# Altium PCB 电源调压板.PcbDoc
Units mm, origin at the board's own origin, x right, y up, seen from the top; angles counter-clockwise.
Board outline 152.4 x 101.6 mm, 2 copper layers (Top Layer, Bottom Layer); 89 components, 50 nets, 243 pads, 57 vias.
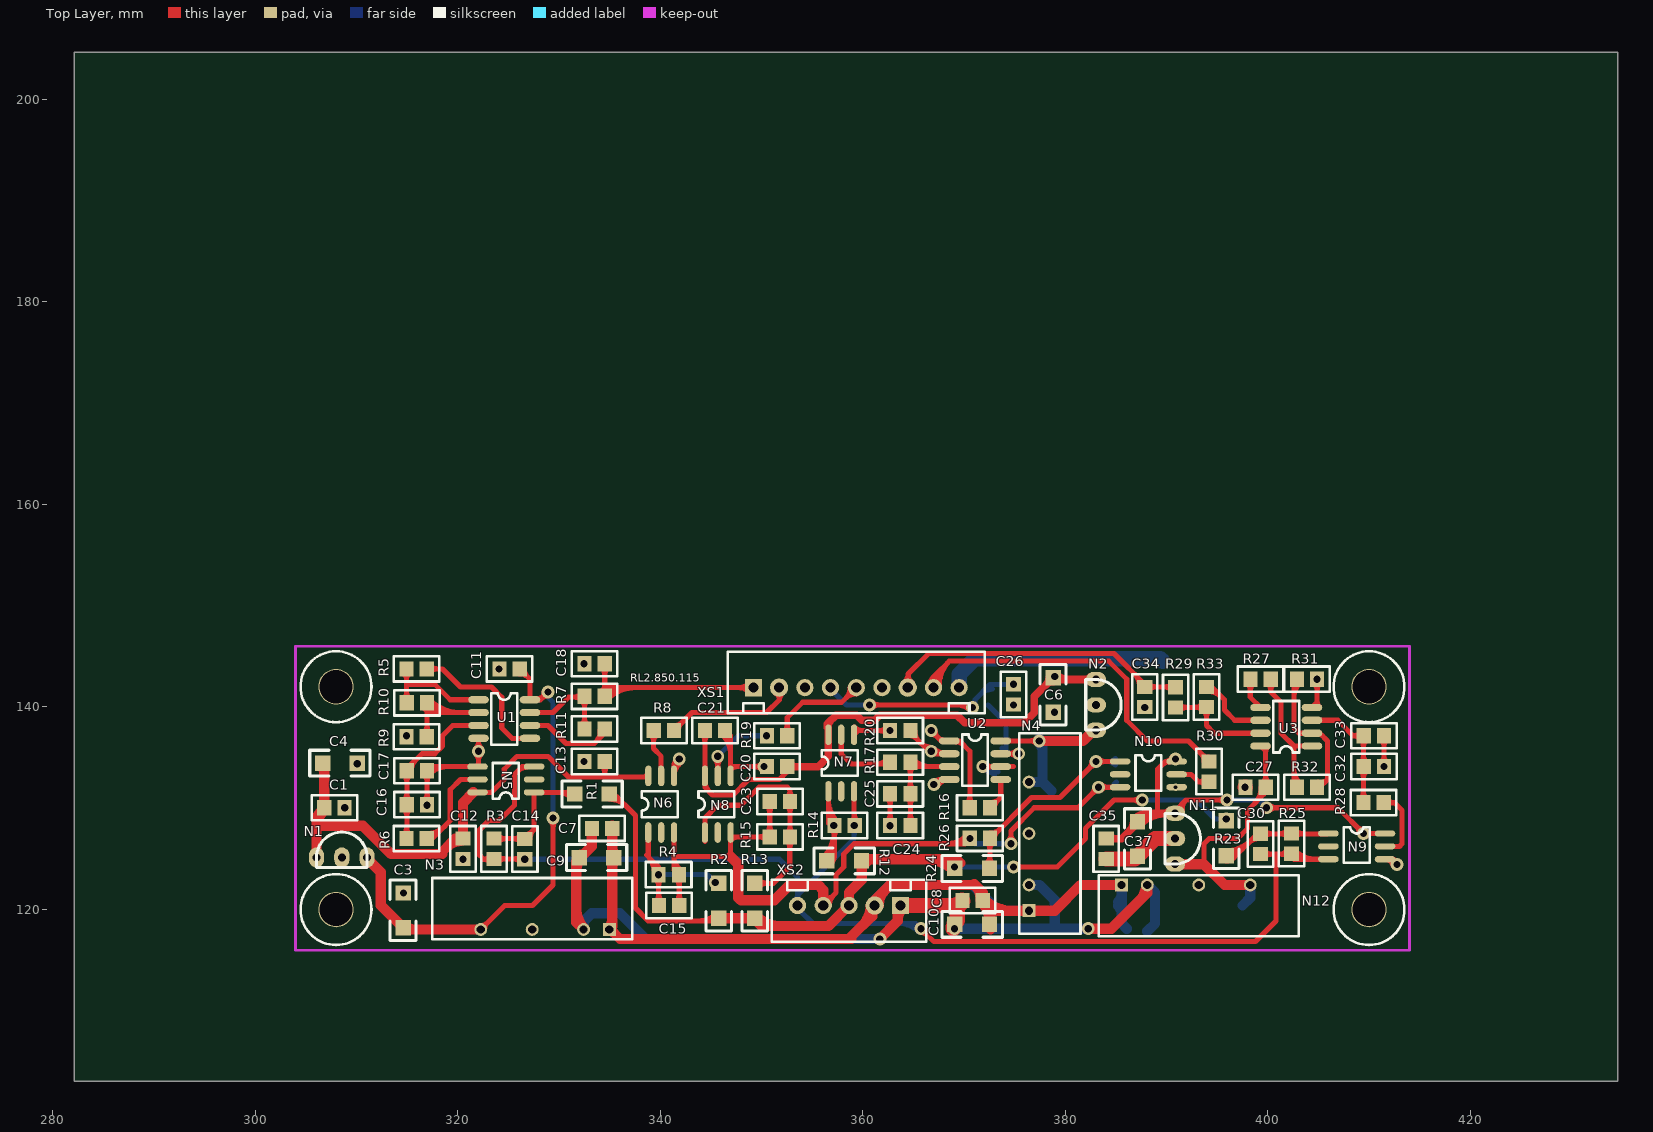
[diagram p0: Top Layer view]
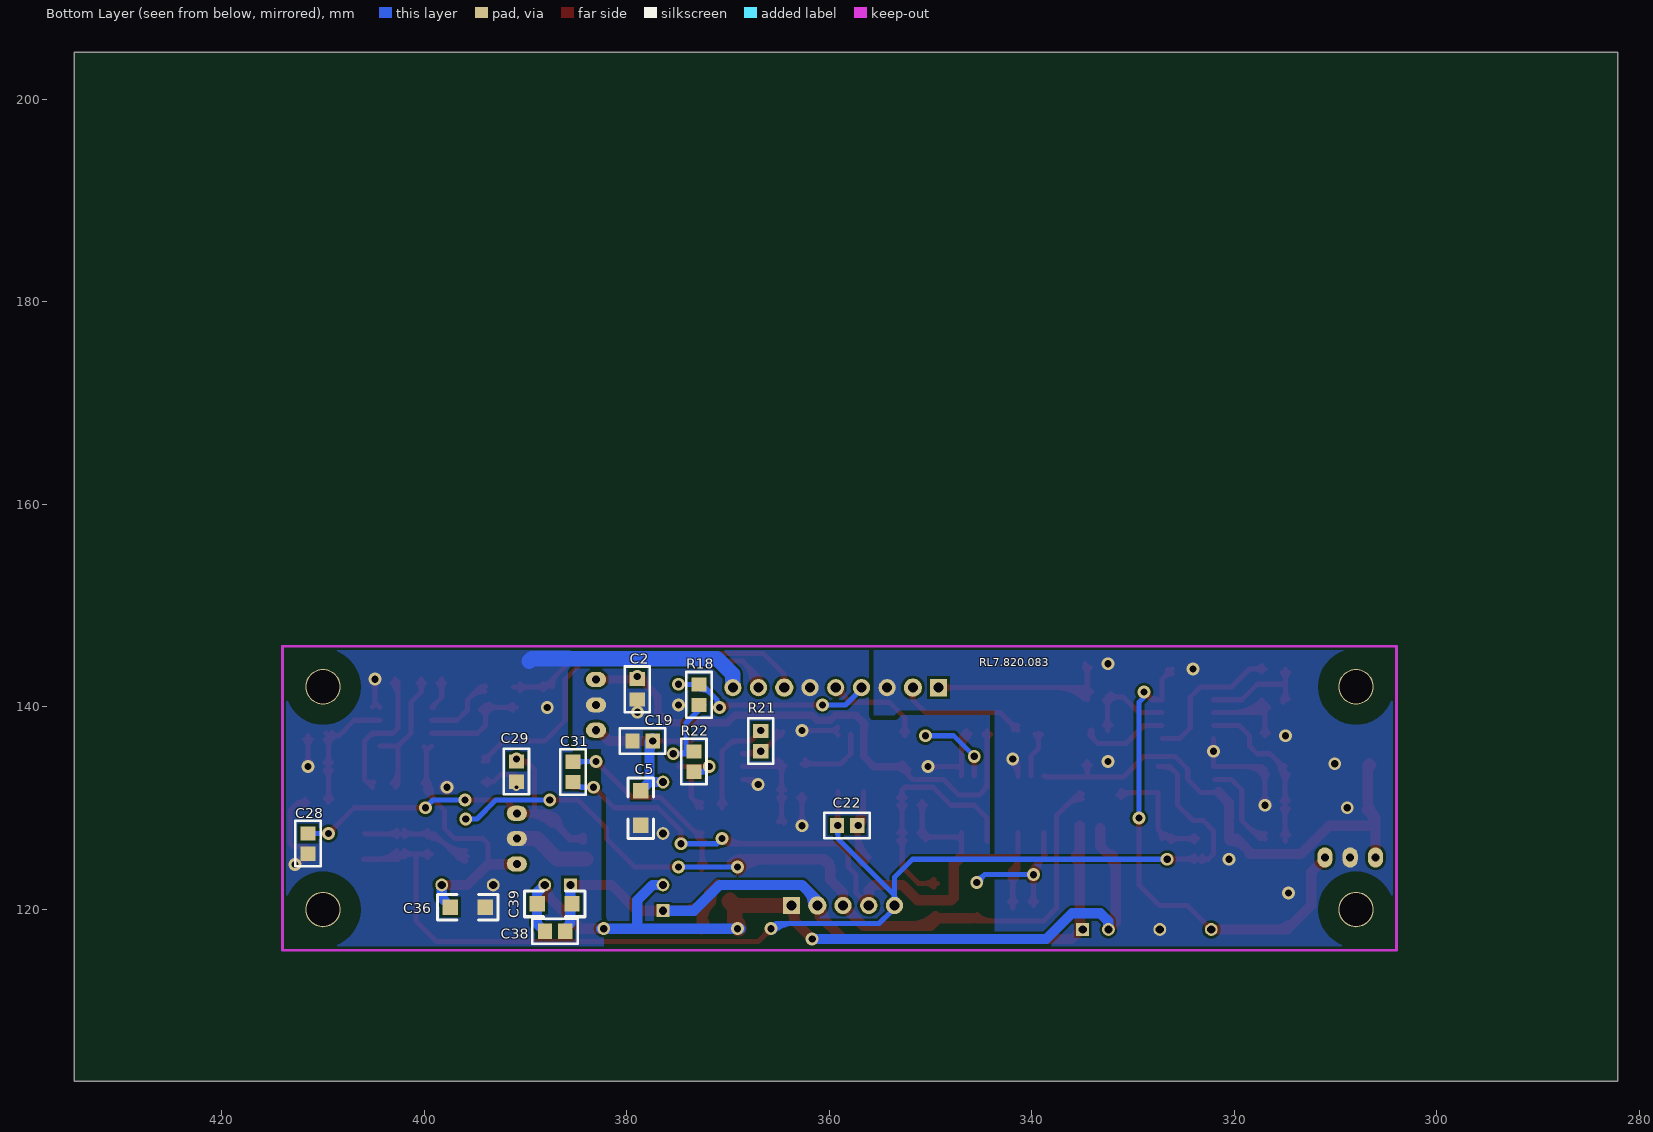
[diagram p1: Bottom Layer view, seen from below]

## Layer stack, top to bottom
Top Layer: signal copper 0.0356
Dielectric: dielectric 0.32, FR-4, Dk 4.8
Bottom Layer: signal copper 0.0356

## Board outline
282.156,103.046 434.556,103.046 434.556,204.646 282.156,204.646

## Design rules (kind name [scope] priority, off if disabled: settings)
Clearance Clearance_1 [(InPolygon) vs (InPolygon)] p1: gap=0.508
Clearance [All] p2: gap=0.254
ComponentClearance [All] p1: gap=0 collisioncheckmode=3 verticalgap=0 showdistances=FALSE
PolygonConnect [All] p1: connectstyle=Direct reliefconductorwidth=0.254 reliefentries=4 polygonreliefangle="90 Angle"
RoutingVias [All] p1: holewidth=0.711 width=1.27 viastyle="Through Hole" minholewidth=0.381 minwidth=0.762 maxholewidth=1.27 maxwidth=2.54
SilkscreenOverComponentPads [All] p1: minsilkscreentomaskgap=0.254
SolderMaskExpansion [All] p1: expansion=0.102
Width [All] p1: maxlimit=5.08 minlimit=0.254 preferedwidth=0.508
26 further rules are at their usual default settings.

## Components (designator, comment, footprint, x,y, rotation, side; value= is the part's Value field where it differs from the comment)
C1 "0.1u" 0805 306.832,130.048 r0 top
C2 "0.1u" 0805 378.968,142.748 r270 bottom
C3 "10u" 1206 315.976,116.84 r90 top
C4 "10u/25V" 1206 305.308,133.096 r0 top
C5 "10u" 1206 379.984,133.096 r270 bottom
C6 "10u/25V" 1206 377.444,144.272 r270 top
C7 "0.1u" 0805 335.28,128.016 r180 top
C8 "0.1u" 0805 371.856,120.904 r180 top
C9 "10u" 1206 336.804,126.492 r180 top
C10 "10u" 1206 373.888,119.888 r180 top
C11 "0.1u" 0805 326.136,143.764 r180 top
C12 "0.1u" 0805 320.548,127 r270 top
C13 "0.1u" 0805 334.532,134.62 r180 top
C14 "0.1u" 0805 326.644,124.968 r90 top
C15 "0.1u" 0805 341.884,120.396 r180 top
C16 "1u" 0805 316.992,130.353 r180 top
C17 "0.1u" 0805 316.992,133.706 r180 top
C18 "0.1u" 0805 334.532,144.272 r180 top
C19 "0.1u" 0805 377.444,136.652 r0 bottom
C20 "0.1u" 0805 352.552,134.112 r180 top
C21 "0.1u" 0805 344.424,137.668 r0 top
C22 "0.1u" 0805 359.248,128.286 r180 bottom
C23 "0.1u" 0805 350.828,130.673 r0 top
C24 "1u" 0805 362.712,128.304 r0 top
C25 "0.1u" 0805 362.712,131.425 r0 top
C26 "0.1u" 0805 374.904,142.24 r270 top
C27 "0.1u" 0805 399.796,132.08 r180 top
C28 "0.1u" 0805 411.48,127.508 r270 bottom
C29 "0.1u" 0805 390.906,134.62 r270 bottom
C30 "0.1u" 0805 399.288,125.476 r90 top
C31 "0.1u" 0805 385.318,132.588 r90 bottom
C32 "1u" 0805 411.48,134.112 r180 top
C33 "0.1u" 0805 411.48,137.16 r180 top
C34 "0.1u" 0805 387.858,141.986 r270 top
C35 "0.1u" 0805 384.048,127 r270 top
C36 "10u" 1206 398.78,118.872 r180 bottom
C37 "10u/25V" 1206 385.78,130.048 r270 top
C38 "0.1u" 0805 386.08,117.856 r0 bottom
C39 "10u" 1206 384.048,121.92 r0 bottom
N1 "78L05" TO-92_2 308.572,125.144 r0 top
N2 "78L05" TO-92_2 383.032,140.208 r270 top
N3 "B1212LM-1W" B0505LS 322.288,118.032 r180 top
N4 "B1212LM-1W" B0505LS 376.428,132.588 r90 top
N5 "FODM8071" SO-6 327.66,131.572 r180 top
N6 "FODM8071" SO-6 338.836,127.508 r90 top
N7 "FODM8071" SO-6 356.616,131.572 r90 top
N8 "FODM8071" SO-6 344.424,127.508 r90 top
N9 "FODM8071" SO-6 405.892,127.508 r0 top
N10 "FODM8071" SO-6 385.318,134.62 r0 top
N11 "78L05" TO-92_2 390.86,127 r270 top
N12 "B1212LM-1W" B0505LS 398.272,122.428 r0 top
R1 "330" 1206 330.2,130.048 r0 top
R2 "330" 1206 344.424,123.952 r270 top
R3 "4.7K" 0805 323.596,127 r270 top
R4 "4.7K" 0805 339.852,123.444 r0 top
R5 "10K" 0805 314.96,143.764 r0 top
R6 "1.5K" 0805 314.96,127 r0 top
R7 "1K" 0805 332.532,141.055 r0 top
R8 "220" 0805 341.376,137.668 r180 top
R9 "10K" 0805 314.96,137.058 r0 top
R10 "2.2K" 0805 316.992,140.411 r180 top
R11 "10K" 0805 334.532,137.837 r180 top
R12 "330" 1206 355.092,123.444 r0 top
R13 "330" 1206 347.98,123.952 r270 top
R14 "4.7K" 0805 357.216,128.286 r0 top
R15 "4.7K" 0805 352.828,127.176 r180 top
R16 "10K" 0805 370.568,130.048 r0 top
R17 "1.5K" 0805 364.712,134.547 r180 top
R18 "1K" 0805 372.872,140.208 r90 bottom
R19 "220" 0805 352.552,137.16 r180 top
R20 "10K" 0805 362.712,137.668 r0 top
R21 "2.2K" 0805 366.776,135.636 r90 bottom
R22 "10K" 0805 373.38,133.604 r90 bottom
R23 "330" 1206 397.256,123.952 r90 top
R24 "330" 1206 373.888,125.416 r180 top
R25 "4.7K" 0805 402.336,127.508 r270 top
R26 "4.7K" 0805 372.568,127.03 r180 top
R27 "10K" 0805 400.304,142.748 r180 top
R28 "1.5K" 0805 409.448,130.556 r0 top
R29 "1K" 0805 390.906,139.954 r90 top
R30 "220" 0805 394.208,134.62 r270 top
R31 "10K" 0805 404.876,142.748 r180 top
R32 "2.2K" 0805 404.876,132.08 r180 top
R33 "10K" 0805 393.954,141.986 r270 top
U1 "TLC2272" SO-8 322.072,140.716 r0 top
U2 "TLC2272" SO-8 368.554,136.652 r0 top
U3 "TLC2272" SO-8 404.368,136.144 r180 top
XS1 "OUTPUT" sip-9 349.212,141.908 r0 top
XS2 "INPUT" sip-5 363.728,120.396 r180 top

## Footprints (in the part's own frame and the unit in brackets; to place one, negate y for a bottom-side part, rotate by r counter-clockwise, add the part's x,y. Pads: shape width x height; smd on the part's side, far side on the other; paste and mask are expansions set on the pad)
0805 [mm]
  rect 1.4x1.5 smd: 1(0,0) 2(2,0)
  silkscreen extent -1.25,-1.25 3.25,1.25
1206 [mil]
  rect 60x60 smd: 1(53.76,53.48) 2(188.76,53.48)
  silkscreen extent 4,3 239,103
B0505LS [mil]
  rect 50x50 hole 32: 1(-500,0)
  round 50 hole 32: 2(-400,0) 3(-200,0) 4(0,0)
  silkscreen extent -589,-200 189,38
sip-5 [mm]
  rect 1.7x1.7 hole 1: 1(0,0)
  round 1.8 hole 1: 2(2.54,0)
  round 1.7 hole 1: 3(5.08,0) 4(7.62,0) 5(10.16,0)
  silkscreen extent -2.54,-2.54 12.7,3.56
sip-9 [mm]
  rect 1.7x1.7 hole 1: 1(0,0)
  round 1.8 hole 1: 2(2.54,0) 7(15.24,0)
  round 1.7 hole 1: 3(5.08,0) 4(7.62,0) 5(10.16,0) 6(12.7,0) 8(17.78,0) 9(20.32,0)
  silkscreen extent -2.54,-2.54 22.86,3.56
SO-6 [mil]
  oval 80x24 smd: 1(3.94,0) 2(3.94,-50) 3(3.94,-100) 4(223.94,-100) 5(223.94,-50) 6(223.94,0)
  silkscreen extent 64,-114 164,25
SO-8 [mil]
  oval 80x28 smd: 1(0,0) 2(0,-50) 3(0,-100) 4(0,-150) 5(200,-150) 6(200,-100) 7(200,-50) 8(200,0)
  silkscreen extent 50,-175 150,25
TO-92_2 [mm]
  oval 1.5x2 hole 0.8: 1(0,0) 2(-2.5,0) 3(2.5,0)
  silkscreen extent -2.5,-1 2.5,2.5

## Part data
C1 C2 C4 C6 C12 C13 C14 C15 C16 C17 C20 C21 C22 C23 C24 C25 C28 C29 C30 C31 C32 C33 C35 C37: library part CAP
C3 C5 C9 C10 C36 C39: library part ELECTRO1, "Electrolytic Capacitor"
C7 C8 C11 C18 C19 C26 C27 C34 C38: library part CAP, "Capacitor"
N1 N2 N11: library part VOL
N3 N4 N12: library part B0505LM
R1 R2 R3 R4 R6 R8 R9 R12 R13 R14 R15 R17 R19 R20 R23 R24 R25 R26 R28 R30 R31: library part Res2, "Resistor"
R5 R7 R10 R11 R16 R18 R21 R22 R27 R29 R32 R33: library part RES2
U1 U2 U3: library part 1458
XS1: library part "Header 9", "Header, 9-Pin"
XS2: library part "Header 5", "Header, 5-Pin"

## Free pads (board coordinates)
  round 3.5 hole 3.3: 0(308,120) 0(308,142) 0(410,120) 0(410,142)

## Via types
v1: diameter 1.27, hole 0.711, Top Layer to Bottom Layer, 56 vias
v2: diameter 0.762, hole 0.381, Top Layer to Bottom Layer, 1 vias

## Nets (pads, with @x,y where several pads share a name; then routed paths per layer and width w, separated by ;. In a path a pad name is that pad's centre, name@x,y a point inside that pad or via, vN(x,y) a via of type N, cw(c..) or ccw(c..) an arc to the next point about the centre after c; other vN are vias at no path point)
+5VISO1: C1.1 C4.1 C12.1 C13.1 N1.2 N5.6 N6.6 | length 62.6
  Top Layer w0.508: 306.324,128.524 306.578,128.27 ; C1.1@306.832,129.794 C1.1 ; N5.6@321.564,131.572 321.818,131.572 N5.6 323.342,131.572 324.612,132.842 324.612,133.858 325.882,135.128 328.93,135.128 330.962,133.096 334.518,133.096 ; C13.1@334.216,134.255 cw(c333.455,133.493) 334.532,133.493 cw(c335.609,133.493) C13.1@334.847,134.255 ; C13.1@334.518,134.606 C13.1 334.532,133.11 334.518,133.096 ; 338.472,133.096 ccw(c338.472,133.56) N6.6@338.8,133.232 ; N6.6@338.582,133.096 334.518,133.096 ; N6.6@338.582,133.196 N6.6
  Top Layer w1.016: N1.2 306.072,128.27 ; 306.072,128.11 cw(c308.227,128.11) C1.1@306.946,129.844 ; 306.072,128.77 cw(c307.147,128.77) C1.1@306.88,129.812 ; C1.1@306.36,129.322 ccw(c305.684,129.998) C1.1@306.64,129.998 ; C4.1@306.494,134.275 cw(c305.677,133.458) 306.832,133.458 ; C4.1 306.832,134.296 C1.1@306.832,130.556 ; C1.1@306.832,129.794 306.072,129.034 306.072,128.27 ; 318.955,126.169 cw(c320.498,124.626) C12.1@320.498,126.808 ; 319.43,126.644 cw(c320.056,126.019) C12.1@320.419,126.825 ; N5.6@321.564,131.572 320.548,130.556 C12.1 319.786,127 318.516,125.73 318.516,125.476 313.436,125.476 310.642,128.27 306.578,128.27 306.072,128.27
+5VISO2: C2.1 C6.1 C20.1 C21.1 N2.2 N7.6 N8.6 | length 65
  Top Layer w0.508: C21.1@344.109,137.303 cw(c343.347,136.541) 344.424,136.541 cw(c345.501,136.541) C21.1@344.739,137.303 ; C21.1 N8.6 344.424,132.08 345.186,131.318 347.218,131.318 348.742,132.842 351.79,132.842 C20.1@352.552,133.604 ; N8.6@344.475,132.485 ccw(c345.575,132.485) 344.797,131.707 ; 352.019,133.071 ccw(c351.529,133.561) C20.1@352.151,133.866
  Top Layer w0.762: C20.1 355.6,134.112 356.616,135.128 N7.6 356.616,138.43 ; C20.1@352.778,133.886 cw(c353.322,133.342) 353.322,134.112 cw(c353.322,134.882) C20.1@352.778,134.338 ; N7.6@356.54,137.971 cw(c357.463,137.971) 356.81,138.624 ; N7.6@356.55,137.933 cw(c356.908,138.138) 356.616,138.43 ; C6.1@378.415,142.519 cw(c378.968,141.965) 378.968,142.748 379.008,142.708 N2.2 ; C6.1@378.421,142.907 cw(c377.502,142.907) 378.152,142.256 cw(c378.802,141.606) C6.1@378.802,142.526 ; C6.1 376.936,141.04 376.936,139.446 375.92,138.43 370.078,138.43 369.316,139.192 361.696,139.192 361.188,138.684 359.918,138.684 359.41,139.192 357.378,139.192 356.616,138.43 ; C6.1@379.072,143.176 ccw(c380.202,144.306) 380.202,142.708 ; C6.1@379.148,143.182 ccw(c380.291,144.325) 380.291,142.708 ; N2.2@382.521,142.447 ccw(c381.891,141.817) 381.891,142.708 ccw(c381.891,143.599) N2.2@382.521,142.969
  Bottom Layer w0.762: C2.1 v1(378.968,143.002)
+5VISO3: C28.1 C29.1 C35.1 C37.1 N9.6 N10.6 N11.2 | length 57.2
  Top Layer w0.508: 389.128,129.54 389.128,133.858 389.89,134.62 ; 389.517,134.247 cw(c390.295,133.469) N10.6@390.295,134.569 ; 389.688,134.418 cw(c390.115,133.991) N10.6@390.281,134.571 ; v1@390.564,135.041 cw(c389.89,135.369) 389.89,134.62 ; N11.2@390.906,129.794 391.922,130.81 ; v1(390.906,134.874) 390.906,134.62 N10.6 389.89,134.62 ; N11.2@391.591,129.62 cw(c392.81,129.922) 391.922,130.81 ; v1@395.717,130.541 ccw(c395.066,129.89) 395.066,130.81 ccw(c395.066,131.73) v1@395.717,131.079 ; v1(395.986,130.81) 391.922,130.81 ; v1(399.888,130.048) 406.908,130.048 v1(409.448,127.508) N9.6 ; v1@400.158,129.779 cw(c400.808,129.128) 400.808,130.048 cw(c400.808,130.968) v1@400.158,130.317 ; v1@409.067,127.508 ccw(c408.147,127.508) 408.798,128.158 ccw(c409.448,128.809) v1@409.448,127.889 ; v1@409.717,127.239 cw(c410.368,126.588) 410.368,127.508 cw(c410.368,128.428) v1@409.717,127.777
  Top Layer w0.762: C35.1@384.302,127 385.572,127 388.072,129.5 N11.2 ; C35.1@384.324,126.774 cw(c384.868,126.23) 384.868,127 cw(c384.868,127.77) C35.1@384.324,127.226 ; 386.406,127.834 ccw(c385.557,128.683) C37.1@386.757,128.683 ; C37.1@386.869,128.952 cw(c388.192,127.629) 388.192,129.5 ; C37.1@387.138,129.064 ccw(c387.138,130.264) 387.987,129.415 ; C37.1@387.408,128.413 cw(c390.032,125.789) N11.2@390.032,129.5 ; N11.2@390.349,129.239 ccw(c389.719,128.609) 389.719,129.5 ccw(c389.719,130.391) N11.2@390.349,129.761
  Bottom Layer w0.508: v1(395.986,130.81) 399.126,130.81 v1(399.888,130.048) ; v1(409.448,127.508) C28.1
+12V: C7.1 C8.1 C9.1 C10.1 C38.1 C39.1 N3.1 N4.1 N12.1 XS2.2 | length 110.4
  Top Layer w1.016: N3.1@334.898,118.122 ccw(c333.976,119.044) 335.28,119.044 ; N3.1 335.28,118.324 C7.1 C7.1@335.28,128.27 ; N3.1@335.026,118.11 335.046,118.09 336.042,117.094 358.902,117.094 ; 335.28,124.138 cw(c336.435,124.138) C9.1@335.618,124.954 ; 335.28,126.13 ccw(c336.435,126.13) C9.1@335.618,125.313 ; 358.902,117.348 360.934,119.38 360.934,120.65 362.712,122.428 371.094,122.428 371.856,121.666 C8.1@371.856,121.158 ; 359.98,118.426 ccw(c358.01,120.396) XS2.2@360.796,120.396 ; 360.934,119.349 cw(c361.714,119.349) XS2.2@361.364,120.046 ; XS2.2@361.58,120.396 cw(c363.753,120.396) 362.216,121.932 ; 371.025,122.497 cw(c369.482,120.954) C8.1@371.664,120.954 ; C8.1@371.72,120.718 cw(c369.553,118.551) C10.1@372.618,118.551 ; C8.1@371.839,120.663 cw(c371.763,119.811) 372.618,119.811 ; C8.1 372.618,120.142 C10.1@372.618,118.022 ; C8.1@371.992,120.99 ccw(c374.652,123.65) 374.652,119.888 ; C10.1@372.343,118.709 ccw(c371.679,119.373) 372.618,119.373 ; 372.872,119.888 N4.1 378.968,119.888 381.508,122.428 N12.1
  Bottom Layer w1.016: XS2.2 361.188,120.904 362.712,122.428 370.84,122.428 373.38,119.888 N4.1 ; XS2.2@361.58,120.396 cw(c363.753,120.396) 362.216,121.932 ; C39.1@385.234,120.382 cw(c384.417,119.566) 385.572,119.566 ; C39.1@385.234,120.741 ccw(c384.417,121.558) 385.572,121.558 ; N12.1 385.572,118.618 C38.1@386.08,118.11
+12VISO1: C3.1 C11.1 N1.3 N3.4 U1.8 | length 57.4
  Top Layer w0.508: N3.4 324.652,120.396 327.406,120.396 329.438,122.428 v1(329.438,129.032) ; N3.4@322.288,118.413 ccw(c322.288,119.333) 322.938,118.682 ccw(c323.589,118.032) N3.4@322.669,118.032 ; C11.1@326.136,143.268 cw(c326.136,142.071) 326.983,142.917 ; C11.1 327.152,142.748 U1.8@327.152,140.97 ; C11.1@326.582,143.714 ccw(c327.538,143.714) 326.862,143.038 ; U1.8 328.168,140.716 v1(328.93,141.478) ; U1.8@327.812,140.818 ccw(c327.812,141.921) v1@328.593,141.141 ; v1@328.549,141.478 cw(c327.629,141.478) 328.28,140.828 cw(c328.93,140.177) v1@328.93,141.097 ; v1@329.169,128.763 cw(c328.518,128.112) 329.438,128.112 cw(c330.358,128.112) v1@329.707,128.763
  Top Layer w1.016: N1.3@311.072,124.652 cw(c311.072,123.701) 311.745,124.373 ; N1.3@311.15,124.968 312.42,123.698 312.42,120.403 C3.1 ; C3.1@314.706,118.11 314.784,118.032 N3.4 ; C3.1@314.797,118.385 ccw(c315.649,119.237) 315.649,118.032
  Bottom Layer w0.508: v1@328.93,140.97 329.438,140.462 v1(329.438,129.032)
+12VISO2: C5.1 C19.1 N2.3 N4.4 U2.8 | length 19.1
  Top Layer w0.508: U2.8 v1(377.444,136.652) ; v1@377.175,136.383 ccw(c376.524,135.732) 376.524,136.652 ccw(c376.524,137.572) v1@377.175,136.921
  Top Layer w1.016: v1(377.444,136.652) 381.762,136.652 N2.3@382.778,137.668
  Bottom Layer w1.016: N4.4 377.768,132.588 ; C19.1@377.354,136.562 cw(c376.355,135.563) 377.768,135.563 ; C19.1@377.444,136.906 377.768,136.582 377.768,132.588 ; C5.1 377.768,132.588
+12VISO3: C27.1 C36.1 N11.3 N12.4 U3.8 | length 31.1
  Top Layer w0.508: 393.7,124.968 393.7,126.492 394.208,127 397.002,127 398.018,128.016 398.018,129.794 399.796,131.572 C27.1 399.796,135.636 U3.8 ; 398.711,130.487 ccw(c397.168,132.03) C27.1@399.35,132.03 ; C27.1@399.481,132.445 ccw(c398.719,133.207) 399.796,133.207 ccw(c400.873,133.207) C27.1@400.111,132.445 ; C27.1@399.578,131.354 ccw(c398.902,132.03) C27.1@399.858,132.03 ; 399.796,135.531 cw(c400.562,135.531) U3.8@400.02,136.072 ; 399.796,135.614 cw(c400.375,135.614) U3.8@400.012,136.065
  Top Layer w1.016: N11.3@391.16,124.46 393.7,124.46 395.732,122.428 N12.4
  Bottom Layer w1.016: C36.1@397.51,120.396 398.272,121.158 N12.4
GND: C7.2 C8.2 C9.2 C10.2 C38.2 C39.2 N3.2 N4.2 N12.2 XS2.1 | length 99
  Top Layer w1.016: 331.724,120.086 ccw(c334.502,120.086) N3.2@332.538,118.122 ; 331.724,123.831 cw(c333.312,123.831) C9.2@332.189,124.954 ; C9.2@332.01,125.388 ccw(c332.01,126.324) C9.2@332.672,125.662 ; N3.2 331.724,118.756 331.724,124.714 333.248,126.238 C7.2@333.248,128.016 ; v1(361.696,117.094) 363.474,118.872 XS2.1@363.474,120.65 ; 363.474,118.957 cw(c365.167,118.957) XS2.1@363.97,120.154 ; 369.062,120.11 369.332,120.38 C8.2 ; v1(382.27,118.11) 384.556,118.11 388.112,121.666 N12.2 ; 387.356,120.91 ccw(c385.839,122.428) N12.2@387.985,122.428
  Top Layer w1.524: XS2.1 369.062,120.396 ccw(c369.062,121.452) C8.2@369.906,120.817 ; 368.9,120.396 ccw(c368.9,121.81) C8.2@369.9,120.81 ; C10.2@368.935,118.11 cw(c369.855,118.11) C10.2@369.204,118.76 ; C10.2@369.062,118.618 369.332,118.888 C8.2@369.332,120.38 ; 369.332,119.739 cw(c370.971,119.739) C8.2@369.812,120.898
  Bottom Layer w1.016: N3.2 332.448,118.834 333.248,119.634 336.042,119.634 338.582,117.094 v1(361.696,117.094) ; v1@368.808,118.11 v1(369.062,118.11) v1(382.27,118.11) v1@382.524,118.11 ; N4.2 377.444,122.428 378.968,120.904 378.968,118.364 ; C38.2@388.112,117.856 388.874,118.618 388.874,121.666 N12.2
GNDISO1: C1.2 C3.2 C4.2 C11.2 C12.2 C13.2 C16.1 C17.1 C18.2 N1.1 N3.3 N5.4 N6.4 R9.1 U1.4 XS1.3 | length 28.4
  Top Layer w0.508: C16.1@316.677,130.718 ccw(c315.915,131.48) 316.992,131.48 ccw(c318.069,131.48) C16.1@317.307,130.718 ; C17.1@316.677,133.34 cw(c315.915,132.579) 316.992,132.579 cw(c318.069,132.579) C17.1@317.307,133.34 ; C16.1@316.723,130.571 ccw(c316.072,131.222) 316.992,131.222 ccw(c317.912,131.222) C16.1@317.261,130.571 ; C17.1@316.948,133.799 cw(c317.703,133.045) 317.703,134.112 ; C17.1 C16.1 ; C17.1@317.246,133.604 317.754,134.112 ; C17.1@317.282,134.094 ccw(c317.509,134.357) 317.754,134.112 ; C17.1@317.307,133.44 cw(c318.929,131.818) 318.929,134.112 ; v1(320.548,124.968) C12.2 ; v1@321.803,135.367 cw(c321.152,134.716) 322.072,134.716 cw(c322.992,134.716) v1@322.341,135.367 ; v1@321.803,135.905 ccw(c321.152,136.556) 322.072,136.556 ccw(c322.992,136.556) v1@322.341,135.905 ; N5.4@321.936,134.148 ccw(c321.608,134.476) 322.072,134.476 ; N5.4 317.754,134.112 ; N5.4@322.072,134.112 v1(322.072,135.636) U1.4 ; v1(324.104,143.764) C11.2 ; v1(332.486,134.62) C13.2 ; v1(332.486,144.272) C18.2 ; N6.4@341.376,133.121 cw(c343.168,133.121) v1@342.109,134.567 ; N6.4 341.376,134.366 v1(341.884,134.874) ; N6.4@341.376,134.123 cw(c342.434,134.123) v1@341.809,134.976 ; N6.4@341.427,133.907 cw(c342.657,133.907) v1@341.787,134.777 ; C16.1 v1(316.992,130.302) C16.1
  Top Layer w0.762: C1.2 v1(308.864,130.048) ; v1(310.102,134.398) C4.2 ; C3.2 v1(314.674,121.634) ; R9.1 v1(314.96,137.16)
GNDISO2: C2.2 C5.2 C6.2 C19.2 C20.2 C21.2 C24.1 C25.1 C26.2 N2.1 N4.3 N7.4 N8.4 R20.1 U2.4 XS1.6 | length 37.4
  Top Layer w0.508: C21.2@346.109,137.303 cw(c344.044,135.238) 346.964,135.238 ; C21.2@346.456,137.668 346.964,137.16 N8.4@346.964,134.112 ; C21.2@346.468,137.662 cw(c345.27,136.464) 346.964,136.464 ; N8.4 N8.4@346.964,134.112 ; N8.4@347,133.871 cw(c347.581,133.29) 347.581,134.112 ; C20.2@349.997,133.843 ccw(c349.346,133.192) 349.346,134.112 ccw(c349.346,135.032) C20.2@349.997,134.381 ; C20.2@350.237,133.797 ccw(c349.475,133.035) 349.475,134.112 ccw(c349.475,135.189) C20.2@350.237,134.427 ; v1(350.266,134.112) C20.2 N8.4@346.964,134.112 ; N7.4 359.564,137.668 ; N7.4@359.192,138.007 ccw(c360.011,138.826) 360.011,137.668 ; N7.4@359.206,137.978 ccw(c359.564,138.029) 359.564,137.668 ; C24.1@362.397,128.669 ccw(c361.635,129.431) 362.712,129.431 ccw(c363.789,129.431) C24.1@363.027,128.669 ; C25.1@362.397,131.06 cw(c361.635,130.299) 362.712,130.299 cw(c363.789,130.299) C25.1@363.027,131.06 ; R20.1@362.397,137.353 ccw(c361.635,136.591) 361.635,137.668 ccw(c361.635,138.745) R20.1@362.397,137.983 ; C24.1@362.443,128.539 ccw(c361.792,129.19) 362.712,129.19 ccw(c363.632,129.19) C24.1@362.981,128.539 ; R20.1@362.443,137.399 ccw(c361.792,136.748) 361.792,137.668 ccw(c361.792,138.588) R20.1@362.443,137.937 ; C25.1 C24.1 ; v1(362.712,137.668) 359.564,137.668 ; v1@366.919,132.397 cw(c367.683,131.965) U2.4@367.683,132.842 ; v1(367.03,132.334) 367.538,132.842 U2.4 ccw(c368.554,131.472) v1@367.362,132.146 ; v1@367.113,132.417 cw(c367.894,131.637) U2.4@367.894,132.74 ; v1(374.904,140.208) C26.2 ; C6.2 v1(378.936,139.478) ; C24.1 v1(362.712,128.27) C24.1
GNDISO3: C27.2 C28.2 C29.2 C32.1 C33.1 C34.2 C35.2 C36.2 C37.2 N9.4 N10.4 N11.1 N12.3 R31.1 U3.4 XS1.9 | length 48.3
  Top Layer w0.508: v1(387.858,139.954) C34.2 ; U3.4 404.876,140.462 ; R31.1@404.561,142.383 cw(c403.799,141.621) 404.876,141.621 cw(c405.953,141.621) R31.1@405.191,142.383 ; R31.1@404.607,142.479 cw(c403.956,141.828) 404.876,141.828 cw(c405.796,141.828) R31.1@405.145,142.479 ; 404.876,140.567 ccw(c405.642,140.567) U3.4@405.1,140.026 ; v1(404.876,142.748) 404.876,140.462 ; U3.4@405.089,140.035 cw(c405.409,140.462) 404.876,140.462 ; C32.1@411.165,134.477 ccw(c410.403,135.239) 411.48,135.239 ccw(c412.557,135.239) C32.1@411.795,134.477 ; C33.1@411.165,136.795 cw(c410.403,136.033) 411.48,136.033 cw(c412.557,136.033) C33.1@411.795,136.795 ; C32.1@411.211,134.381 ccw(c410.56,135.032) 411.48,135.032 ccw(c412.4,135.032) C32.1@411.749,134.381 ; v1(411.48,134.112) C33.1 ; N9.4@412.249,124.968 cw(c412.249,124.321) v1@412.872,124.494 ; v1@412.383,124.358 ccw(c411.58,124.135) N9.4 412.242,124.968 v1(412.75,124.46)
  Top Layer w1.5: C35.2 386.874,125 388.874,127 N11.1 N11.1@390.906,127 ; v1(397.764,132.08) C27.2
  Bottom Layer w1.524: XS1.9 369.532,143.218 371.094,144.78 389.382,144.78 389.636,144.526
  other v2: 390.906,132.08
MCU_5V: R1.2 R2.2 R12.2 R13.2 R23.2 R24.2 XS2.3 | length 99.9
  Top Layer w0.508: R1.2@334.994,130.898 cw(c334.994,128.583) 336.632,130.22 ; R1.2 cw(c334.994,130.317) 335.765,131.087 ; R1.2@335.28,131.572 337.566,129.286 337.566,120.142 338.836,118.872 345.497,118.872 R2.2@345.751,119.126 ; 343.866,118.872 ccw(c343.866,121.074) R2.2@345.423,119.517 ; R2.2@345.694,119.126 R2.2@345.751,119.126 ; R2.2@345.782,119.126 R2.2@345.751,119.126 ; R2.2 R2.2@345.751,119.126 ; R24.2@369.004,124.148 R24.2 ; v1(374.904,124.206) 379.222,124.206 382.016,127 382.016,128.016 384.81,130.81 v1(387.604,130.81) ; v1@375.173,123.937 cw(c375.824,123.286) 375.824,124.206 cw(c375.824,125.126) v1@375.173,124.475 ; v1@387.335,130.541 ccw(c386.684,129.89) 386.684,130.81 ccw(c386.684,131.73) v1@387.335,131.079
  Top Layer w0.762: R2.2@345.782,119.126 R2.2@345.948,119.126
  Top Layer w1.016: R2.2@345.948,119.126 349.25,119.126 350.012,118.364 356.616,118.364 XS2.3 358.648,121.666 359.918,122.936 359.918,124.206 360.68,124.968 ; R13.2@349.518,119.337 ccw(c351.868,121.687) 351.868,118.364 ; R13.2@349.592,119.158 ccw(c350.495,119.158) R13.2@349.857,118.519 ; R12.2@360.066,124.623 cw(c360.899,123.789) 360.899,124.968 ; R12.2@360.096,124.659 cw(c360.68,124.262) 360.68,124.968 ; 366.282,124.968 cw(c366.282,121.246) R24.2@368.914,123.878 ; 366.916,124.968 cw(c366.916,122.06) R24.2@368.972,124.116 ; R24.2@368.577,124.691 cw(c367.944,124.058) R24.2@368.84,124.058 ; 368.735,124.968 cw(c368.735,123.699) R24.2@369.632,124.596 ; v1(369.062,124.206) 368.3,124.968 360.68,124.968 ; R23.2 v1(395.898,128.944)
  Bottom Layer w0.508: v1(369.062,124.206) v1(374.904,124.206) ; v1(387.604,130.81) 392.938,130.81 394.804,128.944 v1(395.898,128.944)
NetC14_2: C14.2 N5.1 R1.1 R3.1 | length 19
  Top Layer w0.508: R3.1 326.644,127 327.56,127.916 N5.1 331.216,131.572 R1.1@331.47,131.318 ; R3.1@323.961,126.685 cw(c324.723,125.923) 324.723,127 cw(c324.723,128.077) R3.1@323.961,127.315 ; 325.44,127 cw(c325.44,125.814) C14.2@326.279,126.653 ; 325.595,127 ccw(c325.595,127.967) C14.2@326.279,127.283 ; C14.2@326.694,127.414 ccw(c326.694,128.293) 327.315,127.671 ; C14.2@327.14,126.968 cw(c328.415,126.968) 327.513,127.869 ; 329.939,131.572 cw(c329.939,129.78) R1.1@331.206,131.047 ; 330.739,131.572 ccw(c330.739,132.233) R1.1@331.206,131.766
NetC15_2: C15.2 N6.1 R2.1 R4.1 | length 26.2
  Top Layer w0.508: 338.663,125.395 cw(c336.712,123.444) R4.1@339.471,123.444 ; N6.1 338.836,125.222 339.852,124.206 ; 339.454,124.604 cw(c338.345,123.494) R4.1@339.914,123.494 ; 339.53,124.528 cw(c338.446,123.444) R4.1@339.979,123.444 ; R4.1@339.537,123.079 cw(c338.775,122.317) 339.852,122.317 cw(c340.929,122.317) R4.1@340.167,123.079 ; C15.2@339.569,120.761 ccw(c338.885,121.445) 339.852,121.445 ; R4.1@339.583,123.175 cw(c338.932,122.524) 339.852,122.524 cw(c340.772,122.524) R4.1@340.121,123.175 ; R4.1@339.623,123.749 ccw(c339.281,124.206) 339.852,124.206 ; R4.1@339.657,123.895 ccw(c339.507,124.206) 339.852,124.206 ; C15.2@339.852,120.396 v1(339.852,123.444) 339.852,124.206 ; 339.852,121.6 ccw(c341.038,121.6) C15.2@340.199,120.761 ; R4.1@340.047,123.895 cw(c340.197,124.206) 339.852,124.206 ; R4.1@340.081,123.749 cw(c340.423,124.206) 339.852,124.206
  Bottom Layer w0.508: v1(339.852,123.444) 344.678,123.444 v1(345.44,122.682) ; v1@345.059,122.682 ccw(c344.139,122.682) 344.79,123.332 ccw(c345.44,123.983) v1@345.44,123.063
NetC16_2: C16.2 C17.2 R6.1 U1.3 | length 24.6
  Top Layer w0.508: R6.1@314.645,127.365 ccw(c313.806,128.204) 314.992,128.204 ; C16.2@314.677,129.987 cw(c313.915,129.226) 314.992,129.226 cw(c316.069,129.226) C16.2@315.307,129.987 ; C16.2@314.677,130.718 ccw(c313.915,131.48) 314.992,131.48 ccw(c316.069,131.48) C16.2@315.307,130.718 ; C17.2@314.677,133.34 cw(c313.915,132.579) 314.992,132.579 cw(c316.069,132.579) C17.2@315.307,133.34 ; R6.1@314.96,126.746 314.992,126.778 C16.2 C17.2 ; 314.992,128.049 ccw(c315.959,128.049) R6.1@315.275,127.365 ; C17.2@314.992,134.202 ccw(c314.992,134.954) C17.2@315.524,134.422 ; C17.2@315.214,134.112 316.484,135.382 317.754,135.382 318.516,136.144 318.516,137.16 319.532,138.176 U1.3 ; C17.2@315.438,133.756 cw(c316.839,133.756) 315.848,134.746
NetC22_2: C22.2 N7.1 R12.1 R14.1 | length 25.9
  Top Layer w0.508: R12.1@356.098,125.162 ccw(c353.4,127.86) R14.1@357.216,127.86 ; R12.1@356.362,124.714 357.216,125.568 ; R12.1 ccw(c354.626,126.634) 357.216,126.634 ; R12.1@356.502,125.308 ccw(c356.581,126.203) 357.216,125.568 ; 356.616,129.244 ccw(c358.098,129.244) R14.1@357.05,128.196 ; 356.616,129.635 ccw(c358.515,129.635) R14.1@357.172,128.292 ; 356.616,130.471 ccw(c359.325,130.471) R14.1@357.409,128.555 ; N7.1@356.616,130.861 ccw(c359.741,130.861) R14.1@357.531,128.651 ; N7.1 356.616,128.524 R14.1@357.124,128.016 ; R12.1@356.817,124.443 ccw(c355.852,125.407) R12.1@357.216,125.407 ; R14.1@356.871,128.017 cw(c356.037,127.183) 357.216,127.183 ; R14.1@356.901,127.921 cw(c356.139,127.159) 357.216,127.159 cw(c358.293,127.159) R14.1@357.531,127.921 ; R12.1@356.963,124.855 cw(c357.839,124.945) 357.216,125.568 ; v1(357.14,128.286) R14.1 357.216,125.568 ; R14.1@357.216,127.55 cw(c357.876,127.55) R14.1@357.409,128.017
NetC23_2: C23.2 N8.1 R13.1 R15.1 | length 33.1
  Top Layer w0.508: N8.1@344.424,126.746 344.424,127.508 N8.1 ; N8.1@344.424,127.762 N8.1 ; R13.1 351.187,122.587 352.806,124.206 R15.1@352.806,127.762 ; R13.1@349.698,122.227 cw(c350.565,121.36) 350.565,122.587 cw(c350.565,123.813) R13.1@349.698,122.946 ; R15.1@352.513,126.811 cw(c351.804,126.102) 352.806,126.102 ; R15.1@352.513,127.541 ccw(c351.751,128.303) 352.828,128.303 ccw(c353.905,128.303) R15.1@353.143,127.541 ; C23.2@352.513,130.308 cw(c351.751,129.547) 352.828,129.547 cw(c353.905,129.547) C23.2@353.143,130.308 ; C23.2@352.513,131.039 ccw(c351.751,131.8) 352.828,131.8 ccw(c353.905,131.8) C23.2@353.143,131.039 ; 352.806,125.996 cw(c353.958,125.996) R15.1@353.143,126.811 ; R15.1@352.806,127.254 R15.1@352.828,127.276 ; R15.1@352.828,126.768 R15.1 ; R15.1@352.828,127.762 C23.2 352.828,131.804 352.552,132.08 349.758,132.08 347.98,130.302 345.694,130.302 344.424,129.032 N8.1
NetC24_2: C24.2 C25.2 R17.1 U2.3 | length 19.2
  Top Layer w0.508: C24.2@364.397,128.669 ccw(c363.635,129.431) 364.712,129.431 ccw(c365.789,129.431) C24.2@365.027,128.669 ; C25.2@364.397,131.06 cw(c363.635,130.299) 364.712,130.299 cw(c365.789,130.299) C25.2@365.027,131.06 ; C25.2@364.397,131.791 ccw(c363.635,132.552) 364.712,132.552 ccw(c365.789,132.552) C25.2@365.027,131.791 ; R17.1@364.397,134.181 cw(c363.635,133.42) 364.712,133.42 cw(c365.789,133.42) R17.1@365.027,134.181 ; C24.2@364.49,128.524 364.712,128.746 C25.2 R17.1 ; R17.1@364.668,134.453 ccw(c365.491,135.276) 365.491,134.112 ; R17.1@364.998,134.112 U2.3 ; R17.1@365.027,134.812 ccw(c366.717,136.502) 366.717,134.112
NetC30_2: C30.2 N9.1 R23.1 R25.1 | length 23.9
  Top Layer w0.508: R23.1@395.732,125.222 R23.1@395.986,125.222 ; R23.1@395.898,124.809 ccw(c395.898,125.866) R23.1@396.645,125.119 ; R23.1 ccw(c395.898,127.601) 397.512,125.986 ; R23.1@395.898,125.825 ccw(c395.898,129.335) 398.379,126.853 ; R23.1@395.99,125.226 R23.1@395.986,125.222 ; R23.1@396.297,125.003 cw(c396.748,124.647) 396.748,125.222 ; R23.1@396.377,125.485 ccw(c396.748,125.615) 396.748,125.222 ; 398.074,126.548 cw(c399.238,125.384) C30.2@399.238,127.03 ; C30.2@399.653,127.161 cw(c400.415,126.399) 400.415,127.476 cw(c400.415,128.553) C30.2@399.653,127.791 ; 401.132,127.476 ccw(c401.132,128.662) R25.1@401.971,127.823 ; 401.287,127.476 cw(c401.287,126.509) R25.1@401.971,127.193 ; R25.1@402.701,127.193 cw(c403.385,126.509) 403.385,127.476 ; R25.1@402.701,127.823 ccw(c403.54,128.662) 403.54,127.476 ; N9.1@405.892,127.508 405.86,127.476 C30.2 399.002,127.476 396.748,125.222 ; R23.1@395.986,125.222 396.748,125.222
NetC31_2: C31.2 N10.1 R24.1 R26.1 | length 31
  Top Layer w0.508: R24.1@372.163,124.417 ccw(c371.187,125.394) 372.568,125.394 ; R26.1@372.253,126.665 cw(c371.491,125.903) 372.568,125.903 cw(c373.645,125.903) R26.1@372.883,126.665 ; 372.568,125.174 ccw(c373.639,125.174) R24.1@372.882,124.417 ; R26.1 372.568,127 372.568,124.002 R24.1@372.618,123.952 ; R26.1@372.568,127.526 ccw(c372.568,128.917) 373.551,127.933 ; R26.1@372.618,127 376.682,131.064 379.476,131.064 v1(383.032,134.62) N10.1 ; R26.1@373.014,127.08 cw(c373.777,127.08) R26.1@373.237,127.619 ; v1@382.651,134.62 cw(c381.731,134.62) 382.382,133.97 cw(c383.032,133.319) v1@383.032,134.239 ; v1@383.301,134.351 cw(c383.952,133.7) 383.952,134.62 cw(c383.952,135.54) v1@383.301,134.889
  Bottom Layer w0.508: v1(383.032,134.62) C31.2@385.064,134.62 ; 384.114,134.62 cw(c384.114,133.434) C31.2@384.953,134.273 ; 384.269,134.62 ccw(c384.269,135.587) C31.2@384.953,134.903
NetC32_2: C32.2 C33.2 R28.1 U3.3 | length 21.1
  Top Layer w0.508: U3.3 406.908,138.684 408.432,137.16 ; R28.1@409.133,130.921 ccw(c408.371,131.683) 409.448,131.683 ccw(c410.525,131.683) R28.1@409.763,130.921 ; C33.2@409.159,136.851 ccw(c408.432,136.152) 408.432,137.16 ; C33.2@409.159,137.469 cw(c408.432,138.168) 408.432,137.16 ; C32.2@409.165,133.747 cw(c408.481,133.063) 409.448,133.063 ; C32.2@409.165,134.477 ccw(c408.481,135.161) 409.448,135.161 ; C33.2@409.165,136.795 cw(c408.481,136.111) 409.448,136.111 ; R28.1 C33.2@409.448,137.16 ; 409.448,132.908 cw(c410.634,132.908) C32.2@409.795,133.747 ; 409.448,135.316 ccw(c410.634,135.316) C32.2@409.795,134.477 ; 409.448,135.956 cw(c410.634,135.956) C33.2@409.795,136.795 ; C33.2@409.702,137.414 C33.2@409.448,137.16 ; 408.432,137.16 C33.2@409.448,137.16
NetN5_5: N5.5 R6.2 | length 11.6
  Top Layer w0.508: R6.2@316.96,126.988 ccw(c316.96,128.263) 317.861,127.361 ; R6.2@316.96,127.496 ccw(c316.96,129.997) 318.729,128.229 ; R6.2@317.5,127 319.278,128.778 319.278,131.826 320.294,132.842 N5.5
NetN6_5: N6.5 R8.2 | length 6.2
  Top Layer w0.508: R8.2@339.061,137.303 cw(c338.377,136.619) 339.344,136.619 ; 339.344,136.464 cw(c340.53,136.464) R8.2@339.691,137.303 ; R8.2@339.344,137.414 339.344,135.89 340.106,135.128 N6.5
NetN7_5: N7.5 R17.2 | length 8.8
  Top Layer w0.508: N7.5 357.886,135.382 358.902,134.366 R17.2@362.712,134.366 ; 361.32,134.366 ccw(c361.32,135.889) R17.2@362.397,134.812 ; 361.951,134.366 cw(c361.951,133.735) R17.2@362.397,134.181
NetN8_5: N8.5 R19.2 | length 9
  Top Layer w0.508: v1@345.425,134.859 cw(c344.774,134.208) 345.694,134.208 cw(c346.614,134.208) v1@345.963,134.859 ; N8.5 v1(345.694,135.128)
  Bottom Layer w0.508: v1(345.694,135.128) 347.726,137.16 v1(350.52,137.16)
NetN9_5: N9.5 R28.2 | length 8.8
  Top Layer w0.508: R28.2@411.48,130.556 412.496,130.556 ; N9.5 413.004,126.238 413.258,126.492 413.258,129.794 412.496,130.556 ; R28.2@411.769,130.247 cw(c412.496,129.548) 412.496,130.556 ; R28.2@411.769,130.865 ccw(c412.496,131.564) 412.496,130.556
NetN10_5: N10.5 R30.2 | length 4.9
  Top Layer w0.508: N10.5 392.43,133.35 393.192,132.588 ; R30.2@393.803,132.891 cw(c393.192,133.357) 393.192,132.588 ; R30.2@393.835,132.312 ccw(c393.192,131.7) 393.192,132.588 ; R30.2@394.208,132.588 393.192,132.588
NetR5_1: R5.1 R10.2 U1.1 | length 14.5
  Top Layer w0.508: R5.1@314.645,143.399 cw(c313.883,142.637) 314.96,142.637 cw(c316.037,142.637) R5.1@315.275,143.399 ; R10.2@314.677,140.777 ccw(c313.993,141.461) 314.96,141.461 ; 314.96,141.615 ccw(c316.146,141.615) R10.2@315.307,140.777 ; R5.1 314.96,142.24 ; R10.2@315.214,140.462 314.96,140.716 314.96,142.24 ; U1.1 319.278,140.716 317.754,142.24 314.96,142.24
NetR5_2: R5.2 U1.5 | length 16.5
  Top Layer w0.508: R5.2 318.516,143.764 320.294,141.986 323.342,141.986 324.358,140.97 324.358,137.922 325.374,136.906 U1.5 ; R5.2@317.275,143.449 cw(c318.037,142.687) 318.037,143.764 cw(c318.037,144.841) R5.2@317.275,144.079
NetR7_1: R7.1 R11.2 U1.7 | length 14.4
  Top Layer w0.508: U1.7 329.438,139.446 330.962,140.97 R7.1@332.486,140.97 ; 331.371,140.97 ccw(c331.371,142.165) R7.1@332.216,141.32 ; 331.539,140.97 cw(c331.539,140.012) 332.216,140.689 cw(c331.455,139.928) 332.532,139.928 cw(c333.609,139.928) R7.1@332.847,140.689 ; R11.2@332.216,138.203 ccw(c331.455,138.964) 332.532,138.964 ccw(c333.609,138.964) R11.2@332.847,138.203 ; R11.2@332.486,137.668 332.532,137.714 R11.2 R7.1
NetR9_2: R9.2 R10.1 U1.2 | length 18.7
  Top Layer w0.508: R10.1@316.589,139.958 ccw(c317.825,141.195) 317.825,139.446 ; R9.2@316.645,137.424 ccw(c315.806,138.262) 316.992,138.262 ; R10.1@316.677,140.046 cw(c315.915,139.284) 316.992,139.284 cw(c318.069,139.284) R10.1@317.307,140.046 ; R10.1@316.948,140.317 ccw(c319.052,142.421) 319.052,139.446 ; R9.2@316.992,137.16 R10.1 ; 316.992,138.108 ccw(c317.959,138.108) R9.2@317.275,137.424 ; 316.992,139.446 U1.2 ; R10.1@317.307,140.677 ccw(c320.278,143.647) 320.278,139.446
NetR11_1: R11.1 U1.6 | length 9.9
  Top Layer w0.508: U1.6 328.93,138.176 330.708,136.398 333.502,136.398 334.264,137.16 R11.1@334.264,137.668 ; 333.682,136.578 ccw(c332.679,137.581) R11.1@334.089,137.738
NetR16_1: R16.1 R21.2 U2.1 | length 14.6
  Top Layer w0.508: v1@366.776,137.287 cw(c366.776,136.367) 367.426,137.018 cw(c368.077,137.668) v1@367.157,137.668 ; v1(366.776,137.668) 367.792,136.652 U2.1 369.57,136.652 370.586,135.636 R16.1@370.586,130.048 ; 367.547,136.897 ccw(c367.894,137.244) U2.1@367.894,136.754 ; U2.1@369.214,136.55 cw(c369.214,135.447) 369.995,136.227 ; R16.1@370.253,130.413 ccw(c369.448,131.218) 370.586,131.218 ; 370.586,131.131 ccw(c371.601,131.131) R16.1@370.883,130.413
NetR16_2: R16.2 U2.5 | length 4.9
  Top Layer w0.508: R16.2@372.568,130.544 ccw(c372.568,131.862) 373.5,130.93 ; R16.2@372.618,130.048 373.634,131.064 U2.5 ; R16.2@373.014,130.098 cw(c373.849,130.098) R16.2@373.259,130.689
NetR18_1: R18.1 R22.2 U2.7 | length 12.1
  Top Layer w0.508: U2.7 v1(375.412,135.382) ; v1@375.143,135.113 ccw(c374.492,134.462) 374.492,135.382 ccw(c374.492,136.302) v1@375.143,135.651
  Bottom Layer w0.508: R18.1@372.364,140.208 374.142,138.43 374.142,135.636 R22.2@373.888,135.382 ; R22.2@373.634,135.382 R22.2@373.888,135.382 ; R22.2@373.745,135.919 ccw(c375.043,137.217) v1@375.043,135.382 ; v1(375.412,135.382) R22.2@373.888,135.382
NetR20_2: R20.2 R21.1 U2.2 | length 9.1
  Top Layer w0.508: R20.2@364.601,137.557 v1@366.522,135.636 ; R20.2@364.712,137.172 cw(c364.712,136.51) R20.2@365.18,136.978 ; R20.2@365.158,137.618 ccw(c366.65,137.618) 365.595,136.563 ; 365.692,136.466 ccw(c366.776,137.55) v1@366.776,136.017 ; v1(366.776,135.636) 367.03,135.382 U2.2 ; v1@366.776,135.89 v1@366.903,135.763 ; v1@367.045,135.905 ccw(c368.309,137.169) U2.2@368.309,135.382
NetR22_1: R22.1 U2.6 | length 7.7
  Top Layer w0.508: v1(371.856,134.112) U2.6 374.904,134.112 ; v1@372.125,133.843 cw(c372.776,133.192) 372.776,134.112 cw(c372.776,135.032) v1@372.125,134.381
  Bottom Layer w0.508: v1(371.856,134.112) 372.364,133.604 ; R22.1@372.991,133.315 ccw(c372.364,132.781) 372.364,133.604 ; R22.1@372.991,133.893 cw(c372.364,134.427) 372.364,133.604 ; R22.1 372.364,133.604
NetR27_1: R27.1 R32.2 U3.1 | length 16.8
  Top Layer w0.508: R27.1@399.989,142.383 cw(c399.227,141.621) 400.304,141.621 cw(c401.381,141.621) R27.1@400.619,142.383 ; R27.1 400.304,141.478 401.32,140.462 401.32,137.414 402.59,136.144 ; 402.59,133.897 ccw(c404.643,133.897) R32.2@403.191,132.445 ; R32.2@402.844,132.08 402.59,132.334 402.59,136.144 ; U3.1 402.59,136.144
NetR27_2: R27.2 U3.5 | length 5.4
  Top Layer w0.508: R27.2@397.989,142.383 cw(c397.305,141.699) 398.272,141.699 ; 398.272,141.544 cw(c399.458,141.544) R27.2@398.619,142.383 ; R27.2@398.272,142.748 398.272,140.97 U3.5 ; 398.854,140.388 cw(c398.421,139.954) U3.5@399.034,139.954
NetR29_1: R29.1 R33.2 U3.7 | length 16.4
  Top Layer w0.508: R29.1 R33.2@393.954,139.954 ; R29.1@391.271,139.639 cw(c392.033,138.877) 392.033,139.954 cw(c392.033,141.031) R29.1@391.271,140.269 ; 392.75,139.954 ccw(c392.75,141.14) R33.2@393.589,140.301 ; 392.905,139.954 cw(c392.905,138.987) R33.2@393.589,139.671 ; R33.2@393.639,139.671 cw(c392.877,138.909) 393.954,138.909 cw(c395.031,138.909) R33.2@394.269,139.671 ; R33.2@393.954,140.208 R33.2 R33.2@393.954,139.954 ; R33.2@394.462,139.7 394.208,139.954 R33.2@393.954,139.954 ; U3.7 394.716,137.414 393.954,138.176 R33.2@393.954,139.954
NetR31_2: R31.2 R32.1 U3.2 | length 16.9
  Top Layer w0.508: 402.59,140.931 cw(c404.643,140.931) R31.2@403.191,142.383 ; R31.2 402.59,142.462 402.59,137.922 403.098,137.414 U3.2@404.622,137.414 ; U3.2 405.13,137.414 405.892,136.652 405.892,132.842 ; R32.1@404.967,132.567 ccw(c405.175,133.559) 405.892,132.842 ; U3.2@405.028,137.312 cw(c405.028,136.822) 405.375,137.169 ; R32.1@405.13,132.08 405.892,132.842
NetR33_1: R33.1 U3.6 | length 9.8
  Top Layer w0.508: R33.1 394.462,141.986 395.732,140.716 395.732,139.7 396.748,138.684 U3.6 ; R33.1@394.004,141.54 cw(c394.004,139.358) 395.547,140.901 ; R33.1@394.004,142.048 cw(c394.004,141.092) R33.1@394.68,141.768
VEN1: R8.1 XS1.2 | length 15.9
  Top Layer w0.508: R8.1 343.154,139.446 350.52,139.446 351.79,140.716 ; R8.1@341.376,138.164 ccw(c341.376,139.361) 342.223,138.515 ; R8.1@341.822,137.718 cw(c342.778,137.718) 342.102,138.394 ; XS1.2@351.426,141.35 cw(c351.054,140.715) 351.79,140.715 ; XS1.2@351.79,141.732 351.79,140.716 ; XS1.2@352.131,141.385 ccw(c352.618,140.715) 351.79,140.715
VEN2: R19.1 XS1.5 | length 13.9
  Top Layer w0.508: R19.1@352.237,137.525 ccw(c351.475,138.287) 352.552,138.287 ccw(c353.629,138.287) R19.1@352.867,137.525 ; R19.1 352.552,138.938 354.076,140.462 357.926,140.462 XS1.5 ; XS1.5@358.776,141.908 cw(c357.337,141.908) 358.355,140.891 cw(c359.372,139.873) XS1.5@359.372,141.312 ; XS1.5@359.41,141.908 XS1.5@359.41,141.986
VEN3: R30.1 XS1.8 | length 44.4
  Top Layer w0.508: XS1.8@366.573,141.88 cw(c367.945,141.972) 366.973,142.945 ; XS1.8@366.696,142.425 ccw(c366.365,143.002) 367.03,143.002 ; XS1.8@367.03,141.986 367.03,143.002 ; XS1.8@367.08,141.914 cw(c369.426,142.072) 367.763,143.735 ; XS1.8@367.342,142.39 cw(c367.785,143.002) 367.03,143.002 ; XS1.8@367.587,141.948 cw(c370.907,142.172) 368.554,144.526 ; 393.361,135.467 cw(c392.515,134.62) R30.1@393.712,134.62 ; 393.482,135.346 ccw(c394.158,136.022) R30.1@394.158,135.066 ; R30.1 392.176,136.652 388.112,136.652 386.08,138.684 386.08,142.748 384.302,144.526 368.554,144.526 ; 367.03,143.002 368.554,144.526
VEN_SIGNAL: C15.1 C23.1 C31.1 N6.3 N8.3 N10.3 R4.2 R15.2 R26.2 XS2.4 | length 101.8
  Top Layer w0.508: 341.376,124.27 ccw(c342.372,124.27) R4.2@341.817,123.442 ; N6.3 341.376,125.222 ; R4.2@341.537,123.079 cw(c340.698,122.24) 341.884,122.24 ; C15.1@341.569,120.761 ccw(c340.807,121.523) 341.884,121.523 ccw(c342.961,121.523) C15.1@342.199,120.761 ; C15.1@341.884,120.142 C15.1 341.884,123.412 R4.2 341.376,123.92 341.376,125.222 ; 341.884,122.395 cw(c342.851,122.395) R4.2@342.167,123.079 ; R4.2@342.1,123.864 cw(c343.01,125.222) 341.376,125.222 ; 346.837,125.095 346.71,125.222 341.376,125.222 ; 346.964,125.222 N8.3 ; N8.3@347,126.861 cw(c347.761,126.1) 347.761,127.176 ; N8.3@347.042,127.176 R15.2 ; R15.2@350.513,126.861 ccw(c349.751,126.099) 349.751,127.176 ccw(c349.751,128.253) R15.2@350.513,127.491 ; R15.2@350.513,127.541 ccw(c349.751,128.303) 350.828,128.303 ccw(c351.905,128.303) R15.2@351.143,127.541 ; C23.1@350.513,130.308 cw(c349.751,129.547) 350.828,129.547 cw(c351.905,129.547) C23.1@351.143,130.308 ; R15.2@350.828,127.608 C23.1 ; XS2.4 357.378,121.666 357.378,123.444 358.14,124.206 358.14,125.476 359.156,126.492 370.078,126.492 v1(370.586,127) ; XS2.4@356.108,120.992 ccw(c356.108,122.431) 357.125,121.413 ccw(c358.143,120.396) XS2.4@356.704,120.396 ; 368.313,126.492 ccw(c368.313,129.235) R26.2@370.253,127.295 ; 368.44,126.492 ccw(c368.44,129.146) R26.2@370.317,127.269 ; 369.539,126.492 ccw(c369.539,128.009) R26.2@370.612,126.936 ; 369.666,126.492 ccw(c369.666,127.92) R26.2@370.676,126.91 ; v1@374.381,126.761 ccw(c373.73,127.412) 374.65,127.412 ccw(c375.57,127.412) v1@374.919,126.761 ; v1(374.65,126.492) 374.65,127 374.65,127.762 376.936,130.048 381.254,130.048 v1(383.286,132.08) N10.3 ; v1@382.905,132.08 cw(c381.985,132.08) 382.636,131.43 cw(c383.286,130.779) v1@383.286,131.699 ; v1@383.555,131.811 cw(c384.206,131.16) 384.206,132.08 cw(c384.206,133) v1@383.555,132.349
  Top Layer w1.016: 346.964,125.222 347.726,124.46 347.726,121.158 347.98,120.904 351.282,120.904 352.806,122.428 355.6,122.428 356.108,121.92 XS2.4
  Bottom Layer w0.508: v1(370.586,127) 371.094,126.492 v1(374.65,126.492) ; v1(383.286,132.08) 384.556,132.08 C31.1@385.064,132.588
VSET1: C18.1 R7.2 XS1.1 | length 29.8
  Top Layer w0.508: R7.2@334.129,141.508 cw(c335.095,140.541) 335.095,141.908 ; R7.2@334.216,141.42 ccw(c333.455,142.181) 334.532,142.181 ccw(c335.609,142.181) R7.2@334.847,141.42 ; C18.1@334.216,143.907 cw(c333.455,143.145) 334.532,143.145 cw(c335.609,143.145) C18.1@334.847,143.907 ; R7.2@334.488,141.149 cw(c336.322,139.315) 336.322,141.908 ; R7.2@334.518,140.716 334.532,140.73 R7.2 334.532,144.032 C18.1@334.772,144.272 ; R7.2@334.847,140.789 cw(c337.548,138.088) 337.548,141.908 ; 334.85,141.908 XS1.1 ; XS1.1@348.791,141.487 ccw(c347.773,140.469) 347.773,141.908 ccw(c347.773,143.347) XS1.1@348.791,142.329
VSET2: C26.1 R18.2 XS1.4 | length 24.3
  Top Layer w0.508: v1(360.68,140.208) 370.586,140.208 v1(370.84,139.954) ; v1@360.949,139.939 cw(c361.6,139.288) 361.6,140.208 cw(c361.6,141.128) v1@360.949,140.477 ; 369.307,140.208 cw(c369.307,138.421) v1@370.571,139.685
  Bottom Layer w0.508: XS1.4@356.87,141.732 358.394,140.208 v1(360.68,140.208) ; v1@370.771,140.329 ccw(c370.7,140.716) 371.094,140.716 ; v1@371.094,140.208 371.094,140.716 ; 371.658,141.28 cw(c372.822,140.116) R18.2@372.822,141.762 ; v1(374.904,142.24) 374.872,142.208 R18.2 372.586,142.208 371.094,140.716
VSET3: C34.1 R29.2 XS1.7 | length 37
  Top Layer w0.508: XS1.7@364.071,142.429 ccw(c363.466,143.256) 364.49,143.256 ; XS1.7@364.49,141.986 364.49,143.256 ; XS1.7@364.88,142.392 cw(c365.642,143.256) 364.49,143.256 ; 386.832,143.266 cw(c385.551,141.986) C34.1@387.362,141.986 ; C34.1@388.223,141.671 cw(c388.985,140.909) 388.985,141.986 cw(c388.985,143.063) C34.1@388.223,142.301 ; 389.702,141.986 cw(c389.702,140.8) R29.2@390.541,141.639 ; 389.857,141.986 ccw(c389.857,142.953) R29.2@390.541,142.269 ; R29.2@391.16,141.986 C34.1 387.858,142.24 384.81,145.288 366.522,145.288 364.49,143.256
VSET_PULSE: C14.1 C22.1 C30.1 N5.3 N7.3 N9.3 R3.2 R14.2 R25.2 XS2.5 | length 151
  Top Layer w0.508: R3.2@323.191,125.271 cw(c322.58,125.737) 322.58,124.968 ; R3.2@323.223,124.692 ccw(c322.58,124.08) 322.58,124.968 ; R3.2@323.596,124.968 322.58,124.968 ; R3.2 326.866,125 C14.1@326.898,124.968 ; R3.2@323.961,124.685 cw(c324.723,123.923) 324.723,125 cw(c324.723,126.077) R3.2@323.961,125.315 ; 325.44,125 cw(c325.44,123.814) C14.1@326.279,124.653 ; 325.595,125 ccw(c325.595,125.967) C14.1@326.279,125.283 ; 325.647,125 cw(c325.647,123.971) C14.1@326.375,124.699 ; 325.801,125 ccw(c325.801,125.811) C14.1@326.375,125.237 ; 325.979,133.701 cw(c326.849,132.831) N5.3@326.849,134.061 ; 326.161,133.883 cw(c326.654,133.389) N5.3@326.836,134.063 ; N5.3 326.39,134.112 325.628,133.35 325.628,130.302 324.104,128.778 323.088,128.778 322.072,127.762 322.072,125.476 322.58,124.968 ; R14.2@358.901,128.651 ccw(c358.284,129.268) 359.156,129.268 ; R14.2@358.903,128.555 ccw(c358.291,129.167) 359.156,129.167 ; R14.2@359.156,128.27 N7.3 ; 359.156,129.244 ccw(c360.13,129.244) R14.2@359.441,128.555 ; 359.156,129.558 ccw(c360.438,129.558) R14.2@359.531,128.651 ; v1(359.172,128.286) R14.2 ; v1@365.76,117.729 cw(c365.76,116.809) 366.41,117.46 cw(c367.061,118.11) v1@366.141,118.11 ; v1(365.76,118.11) 367.03,116.84 375.666,116.84 ; 375.158,116.84 375.666,116.84 ; C30.1 400.812,125.476 ; C30.1@399.653,125.161 cw(c400.415,124.399) 400.415,125.476 cw(c400.415,126.553) C30.1@399.653,125.791 ; 401.132,125.476 ccw(c401.132,126.662) R25.2@401.971,125.823 ; 401.287,125.476 cw(c401.287,124.509) R25.2@401.971,125.193 ; R25.2@402.336,125.476 R25.2@402.082,125.476 ; R25.2@402.342,125.464 ccw(c403.54,126.662) 403.54,124.968 ; R25.2@402.701,125.823 ccw(c404.766,127.888) 404.766,124.968 ; N9.3 402.59,124.968 R25.2@402.082,125.476 ; 375.666,116.84 398.78,116.84 400.812,118.872 400.812,125.476 ; 400.812,125.476 R25.2@402.082,125.476
  Bottom Layer w0.508: v1(326.644,124.968) 351.79,124.968 353.568,123.19 353.568,121.412 ; XS2.5@353.314,120.396 353.822,119.888 355.092,118.618 365.252,118.618 v1(365.76,118.11) ; XS2.5 353.568,121.412 ; C22.1@358.903,128.017 cw(c358.291,127.405) 359.156,127.405 ; 359.156,127.328 cw(c360.13,127.328) C22.1@359.441,128.017 ; C22.1@359.156,128.286 359.156,127 353.568,121.412 ; 363.614,118.618 cw(c363.614,115.964) v1@365.491,117.841 ; 364.84,118.618 cw(c364.84,117.19) v1@365.85,118.2 ; 353.568,121.412 cw(c353,121.412) 353.277,120.916 ccw(c353,121.412) 353.568,121.412 ; 353.568,121.412 ccw(c354.136,121.412) 353.859,120.916 cw(c354.136,121.412) 353.568,121.412
pads on no net: N5.2 N6.2 N7.2 N8.2 N9.2 N10.2

## Polygon pours and split planes (outlines as drawn)
GNDISO2 on Bottom Layer "Top Layer-No Net" (solid, remove dead copper, pour order 1002): 355.6,146.05 385.826,146.05 385.826,135.89 382.524,135.89 382.524,116.078 343.662,116.078 343.662,139.7 353.06,139.7 353.568,139.192 355.6,139.192 355.6,146.05
GNDISO3 on Bottom Layer "Top Layer-No Net" (solid, remove dead copper, pour order 1001): 382.27,116.078 414.02,116.078 414.02,146.05 385.572,146.05 385.572,136.144 382.27,136.144 382.27,116.078
GNDISO1 on Bottom Layer "Top Layer-No Net" (solid, remove dead copper, pour order 1000): 304.038,146.05 355.346,146.05 355.6,145.796 355.6,139.192 353.568,139.192 353.06,139.7 343.662,139.7 343.662,116.078 304.038,116.078 304.038,146.05

## Keep-outs
Keep-Out Layer:
  lines w0.254: 304,116 304,146 414,146 414,116 354,116 304,116

## Silkscreen, mask and mechanical layers (free items; w line width, h text height)
Top Overlay:
  circle w0.254: c308,142 r3.5
  circle w0.254: c410,142 r3.5
  circle w0.254: c410,120 r3.5
  circle w0.254: c308,120 r3.5
  text "RL2.850.115" at 337.058,142.494 h0.8
Bottom Overlay:
  text "RL7.820.083" at 345.186,144.018 h0.8